# Altium PCB CarPCB.PcbDoc
Units mm, origin at the board's own origin, x right, y up, seen from the top; angles counter-clockwise.
Board outline 68.96 x 101.22 mm, 2 copper layers (Top Layer, Bottom Layer); 76 components, 38 nets, 373 pads, 0 vias.
Unrouted connection lines stored in the file: 6.
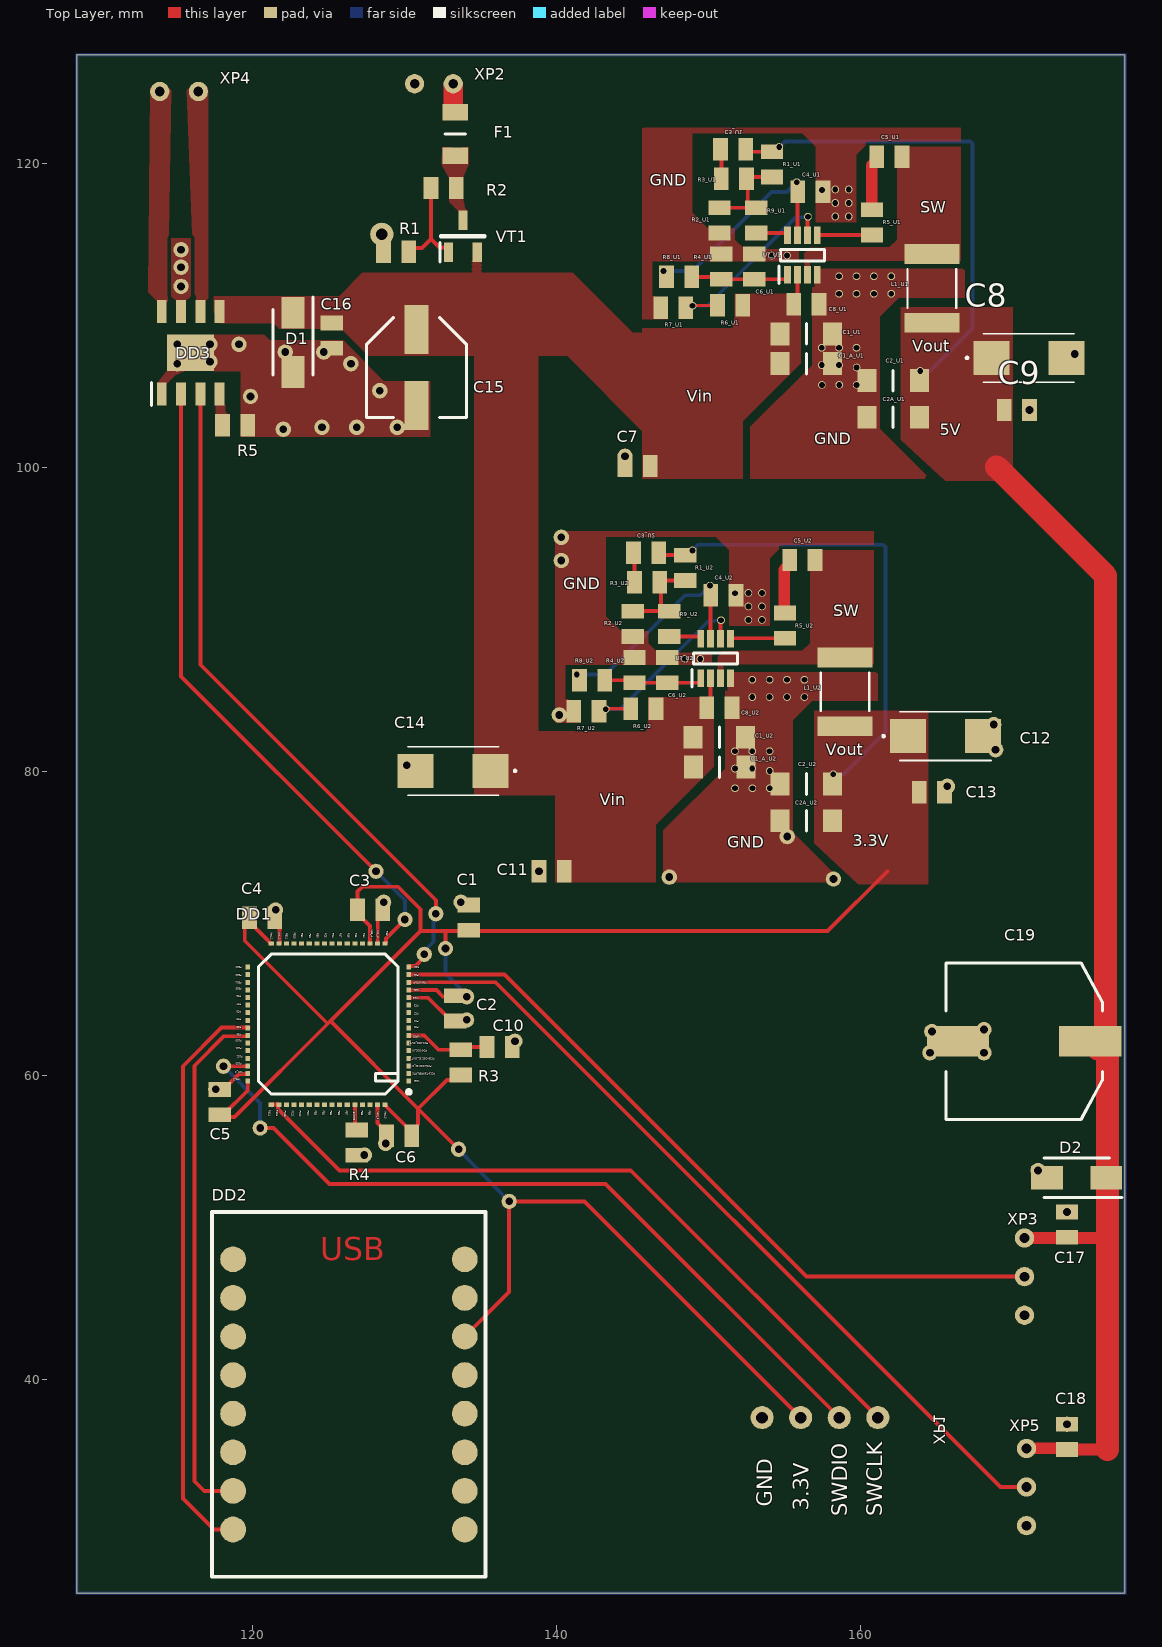
[diagram p0: Top Layer view]
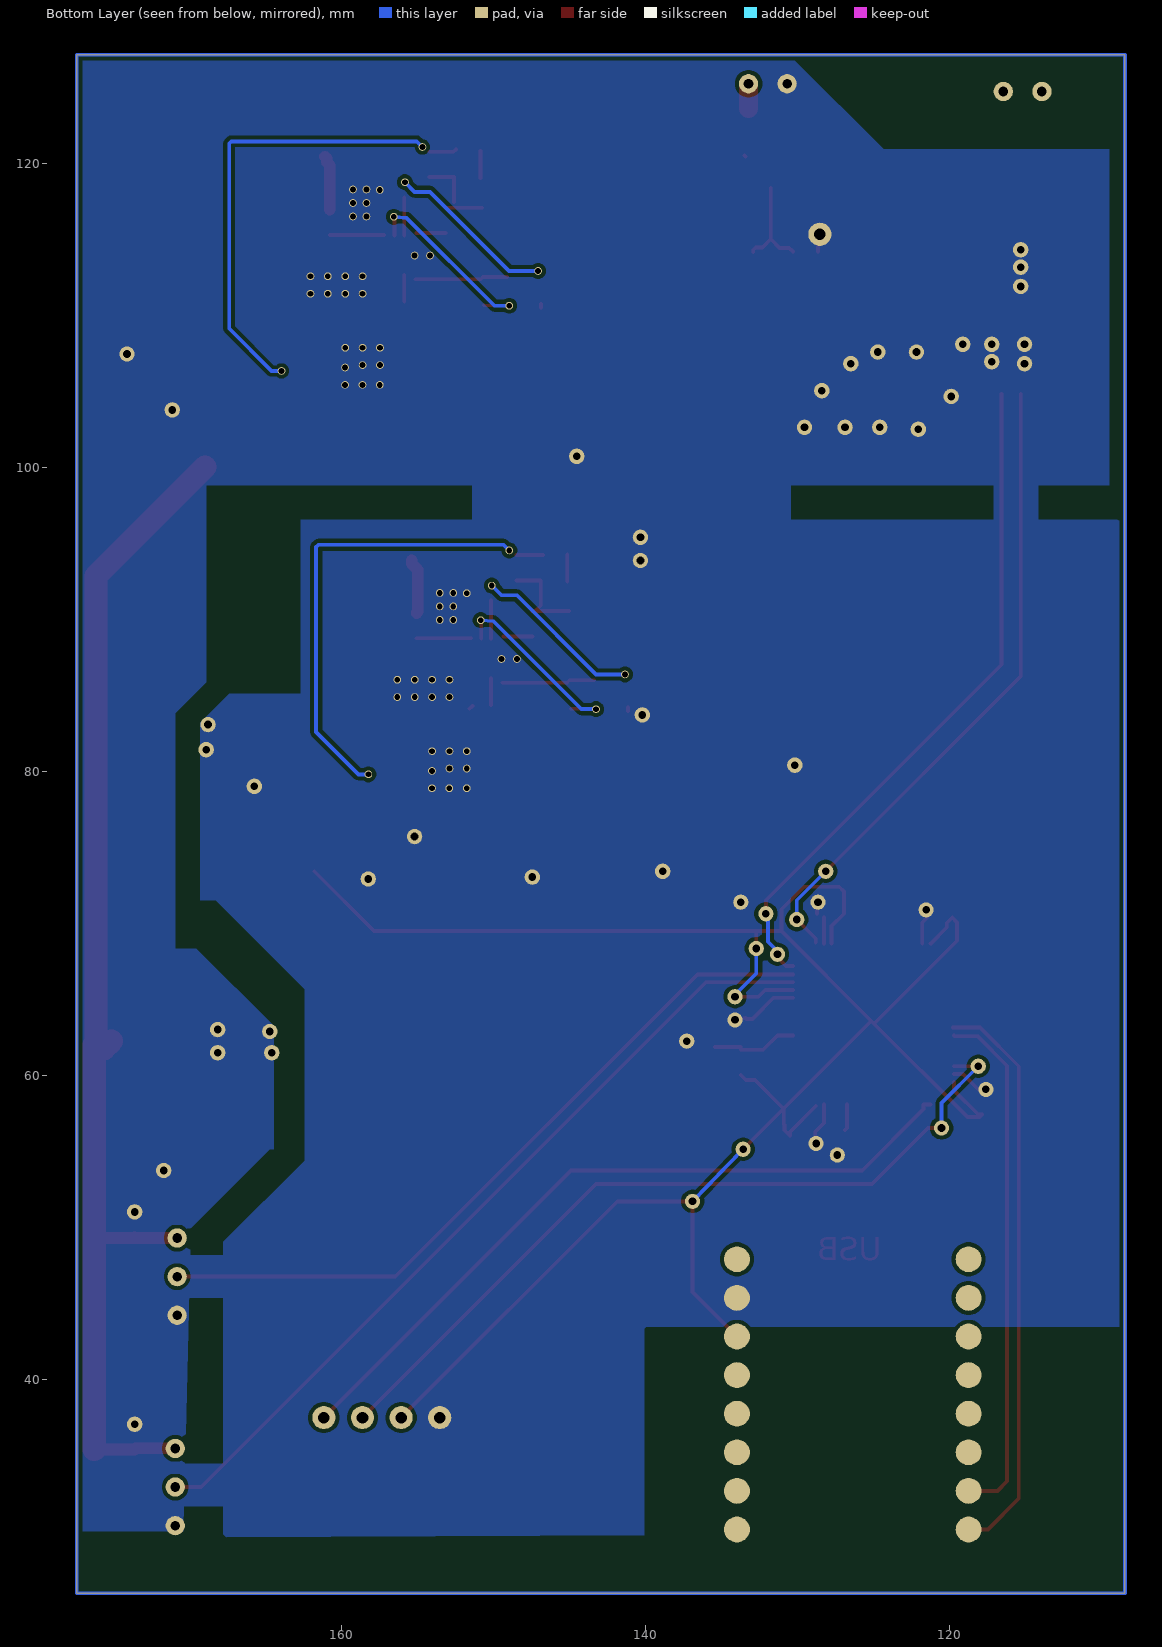
[diagram p1: Bottom Layer view, seen from below]
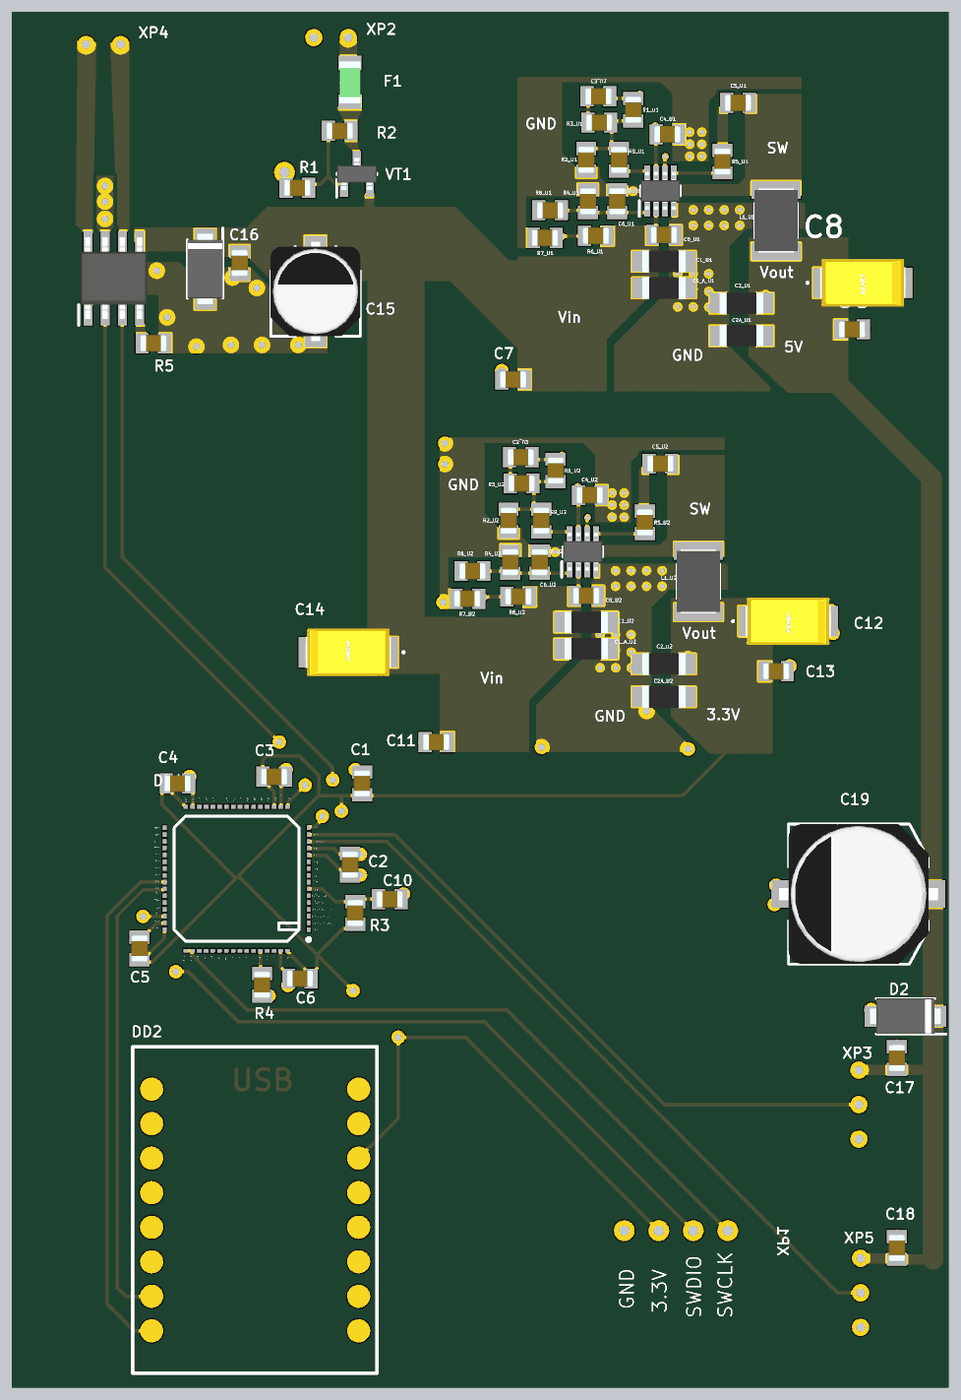
[diagram p2: 3D render of the assembled board from above, using the file's embedded part models]

## Layer stack, top to bottom
Top Solder: solder mask 0.0102, Solder Resist, Dk 3.5
Top Layer: signal copper 0.0356
Dielectric 1: dielectric 0.32, FR-4, Dk 4.8
Bottom Layer: signal copper 0.0356
Bottom Solder: solder mask 0.0102, Solder Resist, Dk 3.5

## Board outline
108.458,25.908 108.458,127.127 177.419,127.127 177.419,25.908

## Design rules (kind name [scope] priority, off if disabled: settings)
Clearance [All] p1: gap=0.254 ignorepadtopadclearanceinfootprint=FALSE
PlaneConnect [All] p1: planeconnectstyle=Direct reliefexpansion=0.508 reliefentries=4 reliefconductorwidth=0.254 reliefairgap=0.254
PolygonConnect [All] p1: connectstyle=Direct reliefconductorwidth=0.254 reliefentries=4 polygonreliefangle="90 Angle" airgapwidth=0.254
RoutingVias [All] p1: holewidth=0.711 width=1.27 viastyle="Through Hole" minholewidth=0.711 minwidth=1.27 maxholewidth=0.711 maxwidth=1.27
SolderMaskExpansion [All] p1: expansion=0.102 istentingtop=FALSE
SupplyNets "Schematic Supply Nets_3" [InNet('GND')] p1: voltage=0.000
SupplyNets "Schematic Supply Nets_2" [InNet('8.4V')] p2: voltage=0.000
SupplyNets "Schematic Supply Nets_1" [InNet('3.3V')] p3: voltage=0.000
SupplyNets "Schematic Supply Nets" [InNet('5V')] p4: voltage=0.000
Width [All] p1: maxlimit=0.254 minlimit=0.254 preferedwidth=0.254
29 further rules are at their usual default settings.

## Classes and differential pairs
channel class Buck5V: U1 U2
component class U2: C1_A_U2 C1_U2 C2_U2 C2A_U2 C3_U2 C4_U2 C5_U2 C6_U2 C8_U2 L1_U2 R1_U2 R2_U2 R3_U2 R4_U2 R5_U2 R6_U2 R7_U2 R8_U2 R9_U2 U1_U2 U?_U2
component class U1: C1_A_U1 C1_U1 C2_U1 C2A_U1 C3_U1 C4_U1 C5_U1 C6_U1 C8_U1 L1_U1 R1_U1 R2_U1 R3_U1 R4_U1 R5_U1 R6_U1 R7_U1 R8_U1 R9_U1 U?_U1
component class Car: C1 C2 C3 C4 C5 C6 C7 C8 C9 C10 C11 C12 C13 C14 C15 C16 C17 C18 C19 D1 D2 DD1 DD2 DD3 F1 GB1 M1 R1 R2 R3 R4 R5 S1 S2 VT1 XP1 XP2 XP3 XP4 XP5

## Components (designator, comment, footprint, x,y, rotation, side; value= is the part's Value field where it differs from the comment)
C1 "10µF" CAPC2012X145N 134.239,70.358 r90 top
C1_A_U1 "NS" ERJ8ENF1000V 156.464,106.807 r180 top (schematic designator C1_A)
C1_A_U2 "NS" ERJ8ENF1000V 150.749,80.264 r180 top (schematic designator C1_A)
C1_U1 "22µF" ERJ8ENF1000V 156.456,108.764 r180 top (schematic designator C1)
C1_U2 "22µF" ERJ8ENF1000V 150.741,82.221 r180 top (schematic designator C1)
C2 "0.1µF" CAPC2012X145N 133.35,64.389 r270 top
C2_U1 "22µF" ERJ8ENF1000V 162.171,105.694 r0 top (schematic designator C2)
C2_U2 "22µF" ERJ8ENF1000V 156.456,79.151 r0 top (schematic designator C2)
C2A_U1 "22µF" ERJ8ENF1000V 162.171,103.281 r0 top (schematic designator C2A)
C2A_U2 "22µF" ERJ8ENF1000V 156.456,76.738 r0 top (schematic designator C2A)
C3 "0.1µF" CAPC2012X145N 127.762,70.866 r0 top
C3_U1 "33pF" CAPC2012X145N 151.638,120.904 r0 top (schematic designator C3)
C3_U2 "33pF" CAPC2012X145N 145.923,94.361 r0 top (schematic designator C3)
C4 "0.1µF" CAPC2012X145N 120.65,70.358 r0 top
C4_U1 "0.1µF" CAPC2012X145N 156.718,118.11 r0 top (schematic designator C4)
C4_U2 "0.1µF" CAPC2012X145N 151.003,91.567 r0 top (schematic designator C4)
C5 "0.1µF" CAPC2012X145N 117.856,58.225 r90 top
C5_U1 "0.1µF" CAPC2012X145N 161.917,120.426 r180 top (schematic designator C5)
C5_U2 "0.1µF" CAPC2012X145N 156.202,93.883 r180 top (schematic designator C5)
C6 "0.1µF" CAPC2012X145N 129.667,56.007 r180 top
C6_U1 "1nF" CAPC2012X145N 153.027,113.187 r90 top (schematic designator C6)
C6_U2 "1nF" CAPC2012X145N 147.312,86.644 r90 top (schematic designator C6)
C7 "10µF" CAPC2012X145N 145.356,100.076 r180 top (schematic designator С7)
C8 "100µF" T491C 171.098,107.188 r0 top
C8_U1 "0.1µF" CAPC2012X145N 156.456,110.707 r180 top (schematic designator C8)
C8_U2 "0.1µF" CAPC2012X145N 150.741,84.164 r180 top (schematic designator C8)
C9 "0.1µF" CAPC2012X145N 170.307,103.759 r0 top
C10 "0.1µF" CAPC2012X145N 136.271,61.849 r180 top (schematic designator С10)
C11 "10µF" CAPC2012X145N 139.7,73.406 r180 top
C12 "100µF" T491C 165.608,82.296 r0 top
C13 "0.1µF" CAPC2012X145N 164.719,78.613 r0 top
C14 "100µF" T491C 133.223,80.01 r180 top
C15 "100µF" EEE0JA331XP 130.81,106.553 r270 top (schematic designator С15)
C16 "0.1µF" CAPC2012X145N 125.222,108.644 r270 top
C17 "0.1µF" CAPC2012X145N 173.609,50.165 r90 top
C18 "0.1µF" CAPC2012X145N 173.609,36.195 r90 top
C19 "470µF" EEEFK1V331P 170.783,62.23 r90 top
D1 "SMAJ10A" SODFL5226X240N 122.682,108.204 r270 top
D2 "SMAJ5.0AQ-13-F" SODFL5226X240N 174.244,53.238 r180 top
DD1 "" STM32F103C6T6 125.002,63.353 r180 top
DD2 "" ESP32C3_SUPER_MINI 117.348,50.989 r0 top
DD3 "" DRV8871DDA 115.951,107.524 r90 top
F1 "Schurter  USI 8053370874 I = 4A, U = 32V" FUSC3116X70N 133.35,121.92 r270 top
L1_U1 "5.5µH" INDC4532X340N 164.719,111.76 r270 top (schematic designator L1)
L1_U2 "5.5µH" INDC4532X340N 159.004,85.217 r270 top (schematic designator L1)
R1 "1M" CAPC2012X145N 129.472,114.173 r0 top
R1_U1 "40.2k" CAPC2012X145N 154.203,119.918 r90 top (schematic designator R1)
R1_U2 "40.2k" CAPC2012X145N 148.488,93.375 r90 top (schematic designator R1)
R2 "1M" CAPC2012X145N 132.588,118.364 r0 top
R2_U1 "7.5k" CAPC2012X145N 150.741,116.235 r270 top (schematic designator R2)
R2_U2 "12.7k" CAPC2012X145N 145.026,89.692 r270 top (schematic designator R2)
R3 "10k" CAPC2012X145N 133.731,60.833 r90 top
R3_U1 "0" CAPC2012X145N 151.695,118.977 r180 top (schematic designator R3)
R3_U2 "0" CAPC2012X145N 145.98,92.434 r180 top (schematic designator R3)
R4 "10k" CAPC2012X145N 126.873,55.558 r90 top
R4_U1 "75k" CAPC2012X145N 150.868,113.187 r90 top (schematic designator R4)
R4_U2 "64.9k" CAPC2012X145N 145.153,86.644 r90 top (schematic designator R4)
R5 "30k" CAPC2012X145N 118.872,102.743 r180 top
R5_U1 "20" CAPC2012X145N 160.774,116.108 r90 top (schematic designator R5)
R5_U2 "20" CAPC2012X145N 155.059,89.565 r90 top (schematic designator R5)
R6_U1 "100k" CAPC2012X145N 151.45,110.647 r180 top (schematic designator R6)
R6_U2 "100k" CAPC2012X145N 145.735,84.104 r180 top (schematic designator R6)
R7_U1 "NS" CAPC2012X145N 147.701,110.49 r180 top (schematic designator R7)
R7_U2 "NS" CAPC2012X145N 141.986,83.947 r180 top (schematic designator R7)
R8_U1 "DNP" CAPC2012X145N 148.082,112.522 r0 top (schematic designator R8)
R8_U2 "DNP" CAPC2012X145N 142.367,85.979 r0 top (schematic designator R8)
R9_U1 "20k" CAPC2012X145N 153.154,116.235 r270 top (schematic designator R9)
R9_U2 "33k" CAPC2012X145N 147.439,89.692 r270 top (schematic designator R9)
U?_U1 "MP2315" SOT65P280X100-8N 156.202,113.949 r90 top (schematic designator U?)
U?_U2 "MP2315" SOT65P280X100-8N 150.487,87.406 r90 top (schematic designator U?)
VT1 "IRLML6401" SOT95P237X112-3N 133.858,115.189 r90 top
XP1 "ST-LINK" ST-LINK 158.369,37.338 r90 top
XP2 "" EXT_SENSOR 132.08,125.222 r0 top
XP3 "" EXT_SENSOR_3pin 170.688,46.355 r90 top
XP4 "" EXT_SENSOR 115.316,124.714 r0 top
XP5 "" EXT_SENSOR_3pin 170.815,32.512 r90 top

## Footprints (in the part's own frame and the unit in brackets; to place one, negate y for a bottom-side part, rotate by r counter-clockwise, add the part's x,y. Pads: shape width x height; smd on the part's side, far side on the other; paste and mask are expansions set on the pad)
CAPC2012X145N [mm]
  rect 0.97x1.47 smd: 1(-0.83,0) 2(0.83,0)
  body extent -1,-0.63 1,0.63, height 1.45
DRV8871DDA [mm]
  rect 1.525x0.65 smd: 1(-2.712,1.905) 2(-2.712,0.635) 3(-2.712,-0.635) 4(-2.712,-1.905) 5(2.712,-1.905) 6(2.712,-0.635) 7(2.712,0.635) 8(2.712,1.905)
  rect 2.4x3.1 smd: 9(0,0)
  silkscreen extent -3.47,2.58 -1.95,2.58, body extent -3,-2.45 3,2.45, height 1.57
EEE0JA331XP [mm]
  rect 3.2x1.6 smd: 1(-2.5,0) 2(2.5,0)
  silkscreen extent -3.3,-3.3 3.3,3.3, body extent -3.65,-3.3 3.65,3.3, height 7.7
EEEFK1V331P [mm]
  rect 2x4.1 smd: 1(0,-4.35) 2(0,4.35)
  silkscreen extent -5.15,-5.15 5.15,5.15, body extent -5.15,-5.85 5.15,5.85, height 10.2
ERJ8ENF1000V [mm]
  rect 1.25x1.5 smd: 1(-1.725,0) 2(1.725,0)
  silkscreen extent 0,-0.67 0,0.67, body extent -1.6,-0.8 1.6,0.8, height 0.6
ESP32C3_SUPER_MINI [mm]
  round 1.7 all layers, no hole: 3.3V(16.637,-8.19) 5V(16.637,-3.11) GND(16.637,-5.65) GPIO0(16.637,-20.89) GPIO1(16.637,-18.35) GPIO2(16.637,-15.81) GPIO3(16.637,-13.27) GPIO4(16.637,-10.73) GPIO5(1.397,-3.11) GPIO6(1.397,-5.65) GPIO7(1.397,-8.19) GPIO8(1.397,-10.73) GPIO9(1.397,-13.27) GPIO10(1.397,-15.81) GPIO20(1.397,-18.35) GPIO21(1.397,-20.89)
  silkscreen extent 0,-24 18,0
EXT_SENSOR [mil]
  round 50 hole 25: 1(45,0) 2(-55,0)
EXT_SENSOR_3pin [mil]
  round 50 hole 25: 1(115,-5) 2(15,-5) 3(-85,-5)
FUSC3116X70N [mm]
  rect 1.07x1.68 smd: 1(-1.43,0) 2(1.43,0)
  silkscreen extent 0,-0.67 0,0.67, body extent -1.55,-0.77 1.55,0.77, height 0.7
INDC4532X340N [mil]
  rect 51x142 smd: 1(-89,0) 2(89,0)
  silkscreen extent -50,-63 50,63, body extent -93,-63 93,63, height 126
SODFL5226X240N [mm]
  rect 2.09x1.53 smd: 1(-1.95,0) 2(1.95,0)
  silkscreen extent -3,-1.3 2.15,1.3, body extent -2.6,-1.3 2.6,1.3, height 2.4
SOT65P280X100-8N [mm]
  rect 1.15x0.45 smd: "1 AAM"(-1.3,0.975) "2 IN"(-1.3,0.325) "3 SW"(-1.3,-0.325) "4 GND"(-1.3,-0.975) "5 BST"(1.3,-0.975) "6 EN/SYNC"(1.3,-0.325) "7 VCC"(1.3,0.325) "8 FB"(1.3,0.975)
  silkscreen extent -1.88,-1.45 0.38,1.55, body extent -1.4,-1.45 1.4,1.45, height 1
SOT95P237X112-3N [mm]
  rect 1.3x0.6 smd: 1(-1.05,0.95) 2(-1.05,-0.95) 3(1.05,0)
  silkscreen extent -1.7,-1.46 0.05,1.5, body extent -1.18,-1.46 1.18,1.46, height 1.12
ST-LINK [mil]
  round 60 hole 30: 3.3V(5,90) GND(5,190) SWCLK(5,-110) SWDIO(5,-10)
STM32F103C6T6 [mm] "CQFP, 64-Leads, Body 9,50x9,50mm, Pitch 0,50mm, IPC Medium Density"
  rect 0.28x0.33 smd: 1(-5.3,3.75) 2(-5.3,3.25) 3(-5.3,2.75) 4(-5.3,2.25) 5(-5.3,1.75) 6(-5.3,1.25) 7(-5.3,0.75) 8(-5.3,0.25) 9(-5.3,-0.25) 10(-5.3,-0.75) 11(-5.3,-1.25) 12(-5.3,-1.75) 13(-5.3,-2.25) 14(-5.3,-2.75) 15(-5.3,-3.25) 16(-5.3,-3.75) 33(5.3,-3.75) 34(5.3,-3.25) 35(5.3,-2.75) 36(5.3,-2.25) 37(5.3,-1.75) 38(5.3,-1.25) 39(5.3,-0.75) 40(5.3,-0.25) 41(5.3,0.25) 42(5.3,0.75) 43(5.3,1.25) 44(5.3,1.75) 45(5.3,2.25) 46(5.3,2.75) 47(5.3,3.25) 48(5.3,3.75)
  rect 0.33x0.28 smd: 17(-3.75,-5.3) 18(-3.25,-5.3) 19(-2.75,-5.3) 20(-2.25,-5.3) 21(-1.75,-5.3) 22(-1.25,-5.3) 23(-0.75,-5.3) 24(-0.25,-5.3) 25(0.25,-5.3) 26(0.75,-5.3) 27(1.25,-5.3) 28(1.75,-5.3) 29(2.25,-5.3) 30(2.75,-5.3) 31(3.25,-5.3) 32(3.75,-5.3) 49(3.75,5.3) 50(3.25,5.3) 51(2.75,5.3) 52(2.25,5.3) 53(1.75,5.3) 54(1.25,5.3) 55(0.75,5.3) 56(0.25,5.3) 57(-0.25,5.3) 58(-0.75,5.3) 59(-1.25,5.3) 60(-1.75,5.3) 61(-2.25,5.3) 62(-2.75,5.3) 63(-3.25,5.3) 64(-3.75,5.3)
  silkscreen extent -5.43,-4.6 4.6,4.6, body extent -5,-5 5,5, height 1.6
T491C [mm]
  rect 2.37x2.23 smd: 1(-2.47,0) 2(2.47,0)
  silkscreen extent -4.12,-1.6 3,1.6, body extent -3.15,-1.75 3.15,1.75, height 2.81

## Part data
C1 C2 C3 C3_U1 C3_U2 C4 C4_U1 C4_U2 C5 C5_U1 C5_U2 C6 C6_U1 C6_U2 C7 C8_U1 C8_U2 C9 C10 C11 C13 C16 C17 C18: library part 0805C, "Capacitor", Arrow Part Number=CL21A106KAYNNNE, Manufacturer_Name=SAMSUNG, Mouser Part Number=187-CL21A106KAYNNNE, Arrow Price/Stock=https://www.arrow.com/en/products/cl21a106kaynnne/samsung-electro-mechanics?utm_currency=USD&region=nac, Datasheet Link=https://datasheet.datasheetarchive.com/originals/distributors/Datasheets_SAMA/6a45835c9b7400e9b49c55c38a8ff4a2.pdf, Height=1.45mm, Manufacturer_Part_Number=CL21A106KAYNNNE, Mouser Price/Stock=https://www.mouser.co.uk/ProductDetail/Samsung-Electro-Mechanics/CL21A106KAYNNNE?qs=yOVawPpwOwmTXAd4dJtNjA%3D%3D
C1_A_U1 C1_A_U2 C1_U1 C1_U2 C2_U1 C2_U2 C2A_U1 C2A_U2: library part 1206C, "Capacitor", Manufacturer_Name=Panasonic, Manufacturer_Part_Number=ERJ8ENF4022V, Datasheet Link=http://docs-europe.electrocomponents.com/webdocs/13ba/0900766b813ba21b.pdf, Height=0.7mm
C8 C12 C14: library part "Capacitor Tantal Case C", "Capacitor Polarised", Manufacturer_Name=YAGEO, Manufacturer_Part_Number=T491C107M016AT, Mouser Part Number=80-T491C107M016AT, Datasheet Link=https://content.kemet.com/datasheets/KEM_T2005_T491.pdf, Height=2.8mm, Mouser Price/Stock=https://www.mouser.co.uk/ProductDetail/KEMET/T491C107M016AT?qs=W04EqCCJmmuOmj0nZmoJtg%3D%3D
C15: library part EEE-FK1E101XP, "Capacitor Polarised", Manufacturer_Name=Panasonic, Mouser Part Number=667-EEE-FK1E101XP, Arrow Part Number=EEE-FK1E101XP, Arrow Price/Stock=https://www.arrow.com/en/products/eee-fk1e101xp/panasonic?region=nac, Datasheet Link=http://industrial.panasonic.com/cdbs/www-data/pdf/RDE0000/ABA0000C1181.pdf, Height=7.8mm, Manufacturer_Part_Number=EEE-FK1E101XP, Mouser Price/Stock=https://www.mouser.co.uk/ProductDetail/Panasonic/EEE-FK1E101XP?qs=qE6bgDGEOCsW6NVslB4juQ%3D%3D
C19: library part EEE-FK1E471P, "Capacitor Polarised", Manufacturer_Name=Panasonic, Mouser Part Number=667-EEE-FK1E471P, Arrow Part Number=EEE-FK1E471P, Arrow Price/Stock=https://www.arrow.com/en/products/eee-fk1e471p/panasonic?utm_currency=USD&region=europe, Datasheet Link=http://industrial.panasonic.com/cdbs/www-data/pdf/RDE0000/ABA0000C1181.pdf, Manufacturer_Part_Number=EEE-FK1E471P, Mouser Price/Stock=https://www.mouser.co.uk/ProductDetail/Panasonic/EEE-FK1E471P?qs=qE6bgDGEOCvvsolWS4cebg%3D%3D
D1: library part SMAJ5.0AQ-13-F, "TVS Diode (Uni-directional)", Manufacturer_Name="Diodes Incorporated", Mouser Part Number=621-SMAJ5.0AQ-13-F, Datasheet Link=https://www.mouser.de/datasheet/2/115/ds40739-1500914.pdf, Height=2.4mm, Manufacturer_Part_Number=SMAJ5.0AQ-13-F, Mouser Price/Stock=https://www.mouser.co.uk/ProductDetail/Diodes-Incorporated/SMAJ5.0AQ-13-F?qs=17u8i%2FzlE8%2FlC4rBSQmAww%3D%3D
D2: "TVS Diode (Uni-directional)", Manufacturer_Name="Diodes Incorporated", Mouser Part Number=621-SMAJ5.0AQ-13-F, Datasheet Link=https://www.mouser.de/datasheet/2/115/ds40739-1500914.pdf, Height=2.4mm, Manufacturer_Part_Number=SMAJ5.0AQ-13-F, Mouser Price/Stock=https://www.mouser.co.uk/ProductDetail/Diodes-Incorporated/SMAJ5.0AQ-13-F?qs=17u8i%2FzlE8%2FlC4rBSQmAww%3D%3D
DD1: library part STM32F103C6T6
DD2: library part ESP32_SUPER_MINI
DD3: library part DRV8871DDA
F1: library part SF-1206S500-2, Manufacturer_Name=Bourns, Mouser Part Number=652-SF-1206S500-2, Arrow Part Number=SF-1206S500-2, Arrow Price/Stock=https://www.arrow.com/en/products/sf-1206s500-2/bourns?region=nac, Datasheet Link=https://componentsearchengine.com/Datasheets/2/SF-1206S500-2.pdf, Height=0.7mm, Manufacturer_Part_Number=SF-1206S500-2, Mouser Price/Stock=https://www.mouser.co.uk/ProductDetail/Bourns/SF-1206S500-2?qs=GIQXYiEeHGD%252By2V9Xr7ztw%3D%3D
L1_U1 L1_U2: library part B82432T1472K, "Inductor", Manufacturer_Name=TDK, Mouser Part Number=871-B82432T1472K, Manufacturer_Part_Number=B82432T1472K, Mouser Price/Stock=https://www.mouser.co.uk/ProductDetail/EPCOS-TDK/B82432T1472K?qs=%2FkiEPUfD%2Fqmca5mh9F0l1g%3D%3D
R1 R1_U1 R1_U2 R2 R2_U1 R2_U2 R3 R3_U1 R3_U2 R4 R4_U1 R4_U2 R5 R5_U1 R5_U2 R6_U1 R6_U2 R7_U1 R7_U2 R8_U1 R8_U2 R9_U1 R9_U2: library part 0805R, "Resistor", Arrow Part Number=CL21A106KAYNNNE, Manufacturer_Name=SAMSUNG, Mouser Part Number=187-CL21A106KAYNNNE, Arrow Price/Stock=https://www.arrow.com/en/products/cl21a106kaynnne/samsung-electro-mechanics?utm_currency=USD&region=nac, Datasheet Link=https://datasheet.datasheetarchive.com/originals/distributors/Datasheets_SAMA/6a45835c9b7400e9b49c55c38a8ff4a2.pdf, Height=1.45mm, Manufacturer_Part_Number=CL21A106KAYNNNE, Mouser Price/Stock=https://www.mouser.co.uk/ProductDetail/Samsung-Electro-Mechanics/CL21A106KAYNNNE?qs=yOVawPpwOwmTXAd4dJtNjA%3D%3D
VT1: "Integrated Circuit", Manufacturer_Name="UMW(Youtai Semiconductor Co.", Height=1.12mm, Manufacturer_Part_Number=IRLML6401
XP2 XP4: library part EXT_SENSOR
XP3 XP5: library part EXT_SENSOR_3pin

## Free pads (board coordinates)
  round 0.508 hole 0.381: 9(152.9,80.167) 9(158.615,106.71) 10(154.051,78.867) 10(159.766,105.41) 11(152.9,81.31) 11(158.615,107.853) 12(151.757,80.167) 12(157.472,106.71) 13(151.765,78.867) 13(157.48,105.41) 14(152.908,78.867) 14(158.623,105.41) 15(154.051,80.01) 15(159.766,106.553) 16(154.043,81.31) 16(159.758,107.853) 17(151.757,81.31) 17(157.472,107.853) 18(155.186,84.866) 18(160.901,111.409) 19(148.463,87.376) 19(154.178,113.919) 20(141.351,86.36) 20(147.066,112.903) 21(153.535,89.946) 21(159.25,116.489) 22(150.844,89.925) 22(156.559,116.468) 23(149.479,87.376) 23(155.194,113.919) 24(158.234,79.786) 24(163.949,106.329) 25(156.329,84.866) 25(162.044,111.409) 26(152.9,84.866) 26(158.615,111.409) 27(156.329,86.009) 27(162.044,112.552) 28(155.186,86.009) 28(160.901,112.552) 29(154.043,84.866) 29(159.758,111.409) 30(154.043,86.009) 30(159.758,112.552) 31(152.9,86.009) 31(158.615,112.552) 32(143.256,84.074) 32(148.971,110.617) 33(152.646,89.946) 33(158.361,116.489) 34(153.535,90.835) 34(159.25,117.378) 35(152.646,90.835) 35(158.361,117.378) 36(152.646,91.724) 36(158.361,118.267) 37(151.765,91.694) 37(157.48,118.237) 38(148.963,94.518) 38(154.678,121.061) 39(150.114,92.202) 39(155.829,118.745) 40(153.535,91.724) 40(159.25,118.267)
  round 1.016 hole 0.508: 41(115.062,106.807) 41(115.062,108.077) 41(115.316,111.887) 41(115.316,113.157) 41(115.316,114.3) 41(117.221,106.934) 41(117.221,108.077) 41(119.126,108.077) 41(119.888,104.648) 41(122.047,102.489) 41(122.174,107.569) 41(124.587,102.616) 41(124.714,107.569) 41(126.492,106.807) 41(126.873,102.616) 41(128.397,105.029) 41(129.54,102.616) 41(130.175,80.391) 41(138.87,73.406) 41(140.208,83.693) 41(140.335,93.853) 41(140.335,95.377) 41(144.526,100.711) 41(147.447,73.025) 41(155.194,75.692) 41(158.242,72.898) 41(164.592,61.468) 41(164.719,62.865) 41(165.735,78.994) 41(168.148,61.468) 41(168.148,62.992) 41(168.783,83.058) 41(168.91,81.407) 41(171.137,103.759) 41(171.704,53.721) 41(173.609,37.025) 41(173.609,50.995) 41(174.117,107.442)
  round 1.524 hole 0.762: 41(128.524,115.316)
  round 1 hole 0.5: 43(128.143,73.406) 43(130.048,70.231) 43(131.318,67.945) 43(132.08,70.612) 43(132.715,68.326) 43(133.731,71.374) 43(134.112,63.627) 43(134.112,65.151) 43(137.287,62.23) 44(117.602,59.055) 44(118.11,60.579) 44(120.523,56.515) 44(121.539,70.866) 44(127.381,54.737) 44(128.651,71.374) 44(128.778,55.499) 44(133.577,55.118) 44(136.906,51.689)

## Nets (pads, with @x,y where several pads share a name; then routed paths per layer and width w, separated by ;. In a path a pad name is that pad's centre, name@x,y a point inside that pad or via, vN(x,y) a via of type N, cw(c..) or ccw(c..) an arc to the next point about the centre after c; other vN are vias at no path point)
3.3V: C1.1 C2.1 C2_U2.2 C2A_U2.2 C3.1 C3_U2.2 C4.1 C5.1 C6.1 C12.1 C13.1 DD1.13 DD1.19 DD1.32 DD1.48 DD1.64 DD2.3.3V L1_U2.2 pad.24@158.234,79.786 pad.38@148.963,94.518 pad.43@132.715,68.326 pad.43@134.112,65.151 pad.44@133.577,55.118 pad.44@136.906,51.689 R1_U2.2 R3.1 XP1.3.3V | length 176
  Top Layer w0.254: DD1.48@119.702,59.557 119.702,58.991 118.106,57.395 C5.1 118.023,57.228 118.823,57.228 124.968,63.373 ; DD1.32 121.227,68.653 120.178,69.702 120.178,70 C4.1 119.507,70.045 119.507,68.834 124.968,63.373 ; DD1.19 127.752,69.796 126.932,70.616 C3.1 126.932,72.068 127.254,72.39 129.584,72.39 131.064,70.91 131.064,69.469 ; DD1.64@128.798,57.956 128.81,57.944 130.497,56.257 C6.1 130.855,56.365 130.855,56.709 130.91,56.764 130.91,57.785 ; DD1.13@130.302,65.595 132.119,65.595 132.563,65.151 ; C2.1@132.69,65.151 pad.43@134.112,65.151 ; pad.43@132.715,68.326 132.715,69.469 ; pad.44@133.577,55.118 130.91,57.785 ; R3.1 133.407,59.679 132.804,59.679 130.91,57.785 ; DD2.3.3V 136.906,45.72 136.906,51.689 141.859,51.689 XP1.3.3V ; C3_U2.2@146.745,94.205 R1_U2.2 ; 161.798,73.406 157.861,69.469 132.715,69.469 ; 124.968,63.373 125.145,63.55 ; 125.145,63.55 131.064,69.469 ; 125.145,63.55 130.91,57.785 ; 131.064,69.469 132.715,69.469
  Bottom Layer w0.254: pad.43@132.715,68.326 132.715,66.675 pad.43@134.239,65.151 ; pad.44@133.577,55.118 pad.44@136.906,51.689 ; pad.38@148.963,94.518 149.336,94.891 161.522,94.891 161.671,94.742 161.671,82.565 158.891,79.786 pad.24@158.234,79.786
5V: C2_U1.2 C2A_U1.2 C3_U1.2 C8.1 C9.1 C17.1 C18.1 C19.1 D2.1 L1_U1.2 pad.24@163.949,106.329 pad.38@154.678,121.061 R1_U1.2 XP3.1 XP5.1 | length 111.1
  Top Layer w0.254: C3_U1.2 152.624,120.748 R1_U1.2 ; C17.1@173.55,49.276 C17.1 ; 176.217,49.335 176.276,49.276
  Top Layer w0.762: XP3.1 C17.1@173.55,49.276 ; XP5.1 C18.1@173.541,35.433 ; C18.1 176.276,35.365 ; C17.1 173.668,49.276 176.276,49.276
  Top Layer w1.524: 168.974,100.013 176.149,92.837 C19.1@176.149,62.23 ; C19.1 C19.1@175.641,61.722 ; C19.1@175.641,61.992 176.276,61.992 176.276,53.238 176.276,49.276 176.276,35.365
  Bottom Layer w0.254: pad.38@154.678,121.061 155.051,121.434 167.237,121.434 167.386,121.285 167.386,109.108 164.606,106.329 pad.24@163.949,106.329
8.4V: "U?_U1.2 IN" "U?_U2.2 IN" C1_A_U1.2 C1_A_U2.2 C1_U1.2 C1_U2.2 C7.1 C8_U1.2 C8_U2.2 C11.1 C14.1 C15.1 C16.1 D1.1 DD3.5 R6_U1.1 R6_U2.1 VT1.2 | length 3.5
  Top Layer w0.254: C8_U2.2@150.162,84.355 150.162,86.106 ; C8_U1.2@155.877,110.898 155.877,112.649
GND: "U?_U1.4 GND" "U?_U2.4 GND" C1.2 C1_A_U1.1 C1_A_U2.1 C1_U1.1 C1_U2.1 C2.2 C2_U1.1 C2_U2.1 C2A_U1.1 C2A_U2.1 C3.2 C4.2 C4_U1.2 C4_U2.2 C5.2 C6.2 C6_U1.2 C6_U2.2 C7.2 C8.2 C8_U1.1 C8_U2.1 C9.2 C10.1 C11.2 C12.2 C13.2 C14.2 C15.2 C16.2 C17.2 C18.2 C19.2 D1.2 D2.2 DD1.12 DD1.18 DD1.31 DD1.47 DD1.63 DD2.GND DD3.1 DD3.7 DD3.9 pad.9 pad.10 pad.11 pad.12 pad.13 pad.14 pad.15 pad.16 pad.17 pad.18 pad.19 pad.21 pad.23 pad.25 pad.26 pad.27 pad.28 pad.29 pad.30 pad.31 pad.33 pad.34 pad.35 pad.36 pad.37 pad.40 pad.41 pad.43@133.731,71.374 pad.43@134.112,63.627 pad.43@137.287,62.23 pad.44@117.602,59.055 pad.44@121.539,70.866 pad.44@127.381,54.737 pad.44@128.651,71.374 pad.44@128.778,55.499 R1.1 R2_U1.2 R2_U2.2 R4.1 R4_U1.2 R4_U2.2 R5.1 R7_U1.2 R7_U2.2 XP1.GND XP2.2 XP3.3 XP5.3 | length 14.6
  Top Layer w0.254: C5.2 118.106,59.055 119.122,60.071 DD1.47@119.702,60.071 ; C4.2 121.793,70.045 DD1.31@121.793,68.653 ; DD1.63 128.252,56.842 128.837,56.257 C6.2 ; DD1.18@128.26,68.653 C3.2@128.26,70.358 ; pad.41@128.524,115.316 128.642,115.198 R1.1 ; C3.2@128.719,70.616 C3.2@128.719,70.866 ; DD1.12@130.302,65.087 131.572,65.087 132.973,63.686 C2.2@133.223,63.686 ; C2.2@133.35,63.686 133.418,63.754 pad.43@134.112,63.627 ; R7_U2.2 R7_U2.2@141.156,84.197 ; R7_U1.2 R7_U1.2@146.871,110.74 ; C8_U2.1@151.384,84.291 C8_U2.1@151.571,84.104
NetC3_U1_1: C3_U1.1 R3_U1.2 | length 1.8
  Top Layer w0.254: R3_U1.2@150.868,119.006 C3_U1.1@150.868,120.795
NetC3_U2_1: C3_U2.1 R3_U2.2 | length 1.8
  Top Layer w0.254: R3_U2.2@145.153,92.463 C3_U2.1@145.153,94.252
NetC4_U1_1: "U?_U1.7 VCC" C4_U1.1 pad.20@147.066,112.903 pad.39@155.829,118.745 R8_U1.1 | length 13.7
  Top Layer w0.254: 155.877,115.249 C4_U1.1@155.877,117.756
  Bottom Layer w0.254: pad.20@147.059,112.903 148.971,112.903 154.178,118.11 155.194,118.11 pad.39@155.829,118.745
NetC4_U2_1: "U?_U2.7 VCC" C4_U2.1 pad.20@141.351,86.36 pad.39@150.114,92.202 R8_U2.1 | length 13.7
  Top Layer w0.254: 150.162,88.706 C4_U2.1@150.162,91.213
  Bottom Layer w0.254: pad.20@141.344,86.36 143.256,86.36 148.463,91.567 149.479,91.567 pad.39@150.114,92.202
NetC5_U1_1: "U?_U1.3 SW" C5_U1.1 L1_U1.1
NetC5_U1_2: C5_U1.2 R5_U1.2 | length 3.6
  Top Layer w0.762: R5_U1.2 160.774,119.863 160.983,120.072 160.983,120.322 C5_U1.2
NetC5_U2_1: "U?_U2.3 SW" C5_U2.1 L1_U2.1
NetC5_U2_2: C5_U2.2 R5_U2.2 | length 3.7
  Top Layer w0.762: R5_U2.2 155.059,90.433 154.993,90.499 154.993,93.254 155.372,93.633 C5_U2.2
NetC6_U1_1: "U?_U1.1 AAM" C6_U1.1 R4_U1.1 R8_U1.2 | length 5.9
  Top Layer w0.254: R8_U1.2@149.098,112.514 R4_U1.1@150.711,112.514 ; R4_U1.1 C6_U1.1 155.129,112.357
NetC6_U2_1: "U?_U2.1 AAM" C6_U2.1 R4_U2.1 R8_U2.2 | length 5.9
  Top Layer w0.254: R8_U2.2@143.383,85.971 R4_U2.1@144.996,85.971 ; R4_U2.1 C6_U2.1 149.414,85.814
NetC10_2: C10.2 DD1.7 R3.2 | length 5.5
  Top Layer w0.254: DD1.7@130.302,62.611 131.318,62.611 132.266,61.663 R3.2 ; R3.2@133.731,61.849 C10.2
NetDD1_41: DD1.41 DD2.GPIO21 | length 38
  Top Layer w0.254: DD2.GPIO21 117.475,30.099 115.443,32.131 115.443,60.579 117.983,63.119 DD1.41@119.761,63.119
NetDD1_42: DD1.42 DD2.GPIO20 | length 34.5
  Top Layer w0.254: DD2.GPIO20 116.84,32.639 116.205,33.274 116.205,60.61 118.152,62.557 119.656,62.557 DD1.42
NetDD1_46: DD1.46 pad.44@118.11,60.579 pad.44@120.523,56.515 XP1.SWDIO | length 52.6
  Top Layer w0.254: pad.44@118.11,60.579 DD1.46@119.702,60.579 ; pad.44@120.523,56.515 121.412,56.515 125.095,52.832 143.256,52.832 XP1.SWDIO
  Bottom Layer w0.254: pad.44@118.11,60.579 120.523,58.166 pad.44@120.523,56.515
NetDD1_49: DD1.49 XP1.SWCLK | length 48.6
  Top Layer w0.254: DD1.49 121.706,58.053 121.706,57.755 125.74,53.721 144.907,53.721 XP1.SWCLK
NetDD1_60: DD1.60 R4.2 | length 1.7
  Top Layer w0.254: DD1.60 126.752,56.509 R4.2
NetDD3_4: DD3.4 R5.2
NetDD3_6: DD3.6 XP4.1
NetDD3_8: DD3.8 XP4.2
NetF1_1: F1.1 XP2.1 | length 1.9
  Top Layer w0.254: F1.1@133.223,123.604 F1.1@133.477,123.35
  Top Layer w1.27: F1.1@133.223,123.604 XP2.1@133.223,125.095
NetF1_2: F1.2 R2.2 VT1.3 | length 0.1
  Top Layer w0.254: F1.2@133.418,120.431 F1.2@133.477,120.49
NetR1_2: R1.2 R2.1 VT1.1 | length 6.7
  Top Layer w0.254: R1.2 130.552,114.423 131.178,114.423 131.758,115.003 ; R2.1 131.758,115.003 ; VT1.1 132.908,114.277 132.735,114.45 132.311,114.45 131.758,115.003
NetR1_U1_1: R1_U1.1 R2_U1.1 R3_U1.1 R9_U1.1 | length 5.7
  Top Layer w0.254: R2_U1.1 R9_U1.1@153.133,117.065 ; R9_U1.1@152.607,117.423 152.607,119.088 R1_U1.1
NetR1_U2_1: R1_U2.1 R2_U2.1 R3_U2.1 R9_U2.1 | length 6.2
  Top Layer w0.254: R2_U2.1 R9_U2.1@147.25,90.522 ; R9_U2.1 R9_U2.1@147.25,90.522 ; R1_U2.1 146.892,92.545 146.892,90.88 R9_U2.1@147.25,90.522
NetR5_U1_1: "U?_U1.5 BST" R5_U1.1 | length 3.6
  Top Layer w0.254: 157.206,115.278 R5_U1.1
NetR5_U2_1: "U?_U2.5 BST" R5_U2.1 | length 3.6
  Top Layer w0.254: 151.491,88.735 R5_U2.1
NetR6_U1_2: "U?_U1.6 EN/SYNC" pad.22@156.559,116.468 pad.32@148.971,110.617 R6_U1.2 R7_U1.1 | length 12.7
  Top Layer w0.254: pad.32@148.971,110.617 R6_U1.2 ; 156.527,115.249 pad.22@156.527,116.35
  Bottom Layer w0.254: pad.32@148.971,110.617 149.94,110.617 155.72,116.396 pad.22@156.559,116.468
NetR6_U2_2: "U?_U2.6 EN/SYNC" pad.22@150.844,89.925 pad.32@143.256,84.074 R6_U2.2 R7_U2.1 | length 12.7
  Top Layer w0.254: pad.32@143.256,84.074 R6_U2.2 ; 150.812,88.706 pad.22@150.812,89.807
  Bottom Layer w0.254: pad.32@143.256,84.074 144.225,84.074 150.005,89.853 pad.22@150.844,89.925
NetR9_U1_2: "U?_U1.8 FB" R9_U1.2 | length 1.9
  Top Layer w0.254: R9_U1.2 155.071,115.405
NetR9_U2_2: "U?_U2.8 FB" R9_U2.2 | length 1.9
  Top Layer w0.254: R9_U2.2 149.356,88.862
PWM0: DD1.15 XP3.2 | length 48.7
  Top Layer w0.254: DD1.15@130.302,66.611 136.589,66.611 156.464,46.736 XP3.2
PWM1: DD1.14 XP5.2 | length 54.4
  Top Layer w0.254: DD1.14 136.017,66.103 167.259,34.861 169.227,32.893 XP5.2
PWM2: DD1.16 DD3.3 pad.43@131.318,67.945 pad.43@132.08,70.612 | length 45
  Top Layer w0.254: DD3.3 116.586,86.995 132.08,71.501 pad.43@132.08,70.612 ; DD1.16@130.302,67.183 130.752,67.183 131.318,67.749 pad.43@131.318,67.945
  Bottom Layer w0.254: pad.43@131.318,67.945 131.318,68.147 131.937,68.766 131.937,70.469 pad.43@132.08,70.612
PWM3: DD1.17 DD3.2 pad.43@128.143,73.406 pad.43@130.048,70.231 | length 42.7
  Top Layer w0.254: DD3.2 115.316,86.233 pad.43@128.143,73.406 ; DD1.17@128.798,68.707 128.798,68.981 pad.43@130.048,70.231
  Bottom Layer w0.254: pad.43@128.143,73.406 130.048,71.501 pad.43@130.048,70.231
pads on no net: DD1.1 DD1.2 DD1.3 DD1.4 DD1.5 DD1.6 DD1.8 DD1.9 DD1.10 DD1.11 DD1.20 DD1.21 DD1.22 DD1.23 DD1.24 DD1.25 DD1.26 DD1.27 DD1.28 DD1.29 DD1.30 DD1.33 DD1.34 DD1.35 DD1.36 DD1.37 DD1.38 DD1.39 DD1.40 DD1.43 DD1.44 DD1.45 DD1.50 DD1.51 DD1.52 DD1.53 DD1.54 DD1.55 DD1.56 DD1.57 DD1.58 DD1.59 DD1.61 DD1.62 DD2.5V DD2.GPIO0 DD2.GPIO1 DD2.GPIO2 DD2.GPIO3 DD2.GPIO4 DD2.GPIO5 DD2.GPIO6 DD2.GPIO7 DD2.GPIO8 DD2.GPIO9 DD2.GPIO10
copper on no net: | length 340.4
  Bottom Layer w0.254: 108.458,25.908 177.419,25.908 177.419,127.127 108.458,127.127 108.458,25.908

## Polygon pours and split planes (outlines as drawn)
3.3V on Top Layer "3.3V_L01_P022" (solid, pour order 22): 159.871,72.547 156.964,75.253 156.964,83.977 164.465,83.977 164.465,72.547
5V on Top Layer "5V_L01_P002" (solid, remove dead copper, pour order 2): 165.586,99.09 162.679,101.796 162.679,110.52 170.053,110.52 170.053,99.09
8.4V on Top Layer "8.4V_L01_P044" (solid, pour order 44): 134.62,78.422 141.224,78.422 141.224,82.486 141.351,82.614 138.811,82.614 138.811,107.886 134.62,107.886
NetC5_U2_1 on Top Layer "NETC5_U2_1_L01_P021" (solid, pour order 21): 150.995,86.644 150.614,86.644 150.614,87.533 150.995,87.914 156.202,87.914 156.71,88.422 156.71,94.518 160.901,94.518 160.901,87.025 150.995,87.025
GND on Top Layer "GND_L01_P023" (solid, pour order 23): 158.869,72.674 147.058,72.674 147.058,76.103 151.122,80.167 151.122,85.374 151.376,85.628 151.376,86.517 161.028,86.517 161.155,86.39 161.155,84.612 156.837,84.612 155.567,83.342 155.567,75.976
8.4V on Top Layer "8.4V_L01_P024" (solid, pour order 24): 150.36,80.294 146.55,76.484 146.55,72.674 139.946,72.674 139.946,82.58 145.915,82.58 146.042,83.342 146.042,84.866 146.804,84.866 150.36,84.866
GND on Top Layer "GND_L01_P025" (solid, pour order 25): 150.487,87.787 150.233,87.533 150.233,86.995 139.946,86.995 139.946,95.915 140.073,95.788 160.901,95.788 160.901,94.899 154.932,94.899 154.043,94.01 154.043,89.565 151.376,89.565 151.376,94.518 150.487,95.407 143.248,95.407 143.248,90.2 144.264,89.184 146.042,89.184 146.042,88.422 146.677,87.787 150.233,87.787
GND on Top Layer "GND_L01_P027" (solid, pour order 27): 141.605,84.709 141.605,83.185 139.954,83.185 139.954,86.987 139.946,86.995 140.596,86.995 140.596,84.716 140.589,84.709
NetDD3_4 on Top Layer "NETDD3_4_L01_P043" (hatched Horizontal grid 0 track 0.025, pour order 43): 117.602,104.14 117.602,103.378 118.491,103.378 118.237,103.632 118.237,104.14
GND on Top Layer "GND_L01_P042" (solid, remove dead copper, pour order 42): 113.718,105.484 114.427,106.421 114.427,107.95 114.554,107.95 115.824,106.68 115.951,106.553 115.824,106.426 114.935,106.045 114.046,105.156
NetDD3_6 on Top Layer "NETDD3_6_L01_P041" (solid, pour order 41): 115.697,124.968 117.221,124.968 117.094,124.841 117.094,111.125 116.84,110.871 116.332,110.871 116.332,111.252 116.205,111.379
NetDD3_8 on Top Layer "NETDD3_8_L01_P040" (solid, pour order 40): 113.792,110.871 113.157,111.506 113.282,124.968 114.677,124.968 114.427,110.871
GND on Top Layer "GND_L01_P039" (solid, pour order 39): 115.57,110.871 115.951,111.252 115.951,115.062 114.681,115.062 114.681,111.252 115.062,110.871
GND on Top Layer "GND_L01_P038" (solid, pour order 38): 117.475,108.712 120.777,108.712 121.158,108.331 125.984,108.331 128.651,105.664 131.699,105.664 131.699,101.981 119.253,101.981 119.253,106.299 117.475,106.299
8.4V on Top Layer "8.4V_L01_P036" (solid, pour order 36): 117.856,109.474 121.412,109.474 121.793,109.093 125.857,109.093 127.635,107.315 140.716,107.315 146.304,101.727 146.304,108.839 145.034,108.839 141.097,112.776 127.254,112.776 125.73,111.252 117.475,111.252 117.475,110.236
8.4V on Top Layer "8.4V_L01_P035" (hatched Horizontal grid 0 track 0.254, pour order 35): 134.556,113.665 134.556,111.989 135.319,111.989 135.001,112.306 135.001,113.754
NetF1_2 on Top Layer "NETF1_2_L01_P030" (hatched Horizontal grid 0 track 0.025, remove dead copper, pour order 30): 134.112,116.84 133.985,117.094 133.858,117.729 132.969,117.729 132.969,117.475 133.604,116.84
NetF1_2 on Top Layer "NETF1_2_L01_P028" (solid, pour order 28): 132.969,118.999 132.461,119.888 132.514,121.031 134.239,121.031 134.239,119.888 134.112,119.634 133.858,118.999
GND on Top Layer "GND_L01_P003" (solid, remove dead copper, pour order 3): 164.584,99.217 152.773,99.217 152.773,102.646 156.837,106.71 156.837,111.917 157.091,112.171 157.091,113.06 166.743,113.06 166.87,112.933 166.87,111.155 162.552,111.155 161.282,109.885 161.282,102.519
8.4V on Top Layer "8.4V_L01_P004" (solid, remove dead copper, pour order 4): 156.075,106.837 152.265,103.027 152.265,99.217 145.661,99.217 145.661,109.123 151.63,109.123 151.757,109.885 151.757,111.409 152.519,111.409 156.075,111.409
GND on Top Layer "GND_L01_P000" (solid, remove dead copper, pour order 0): 147.32,111.252 147.32,109.728 145.669,109.728 145.669,113.53 145.661,113.538 146.311,113.538 146.311,111.259 146.304,111.252
NetC5_U1_1 on Top Layer "NETC5_U1_1_L01_P001" (solid, remove dead copper, pour order 1): 156.71,113.187 156.329,113.187 156.329,114.076 156.71,114.457 161.917,114.457 162.425,114.965 162.425,121.061 166.616,121.061 166.616,113.568 156.71,113.568
GND on Top Layer "GND_L01_P006" (solid, remove dead copper, pour order 6): 156.202,114.33 155.948,114.076 155.948,113.538 145.661,113.538 145.661,122.458 145.788,122.331 166.616,122.331 166.616,121.442 160.647,121.442 159.758,120.553 159.758,116.108 157.091,116.108 157.091,121.061 156.202,121.95 148.963,121.95 148.963,116.743 149.979,115.727 151.757,115.727 151.757,114.965 152.392,114.33 155.948,114.33
GND on Bottom Layer "GND_L02_P053" (solid, pour order 53): 117.094,99.187 117.094,95.25 114.173,95.25 114.173,99.187
GND on Bottom Layer "GND_L02_P048" (solid, pour order 48): 167.767,29.591 167.767,49.022 162.433,54.356 162.433,65.659 168.275,71.501 169.291,71.501 169.291,83.185 167.386,85.09 162.687,85.09 162.687,96.52 108.966,96.52 108.839,96.647 108.712,96.52 108.712,29.845
GND on Bottom Layer "GND_L02_P052" (solid, pour order 52): 167.767,34.417 170.942,34.417 170.942,31.623 167.767,31.623
GND on Bottom Layer "GND_L02_P051" (solid, pour order 51): 167.513,48.133 170.434,48.133 170.434,45.339 167.513,45.339
GND on Bottom Layer "GND_L02_P050" (solid, pour order 50): 130.429,100.076 130.429,95.25 131.318,96.139 151.384,96.139 151.384,99.695
GND on Bottom Layer "GND_L02_P049" (solid, pour order 49): 109.474,120.904 124.333,120.904 130.302,126.873 177.292,126.873 177.292,99.441 176.657,98.806 109.474,98.806
GND on Bottom Layer "GND_L02_P046" (solid, pour order 46): 144.018,101.6 146.431,101.6 146.431,99.06 144.018,99.06
GND on Bottom Layer "GND_L02_P005" (solid, pour order 5): 167.513,99.06 167.513,122.301 145.415,122.301 145.415,99.06
GND on Bottom Layer "GND_L02_P045" (solid, pour order 45): 170.434,29.591 177.165,29.591 177.165,115.316 169.799,122.682 145.415,122.682 145.415,99.06 168.91,99.06 168.91,85.852 170.942,83.82 170.942,68.326 169.545,68.326 164.465,63.246 164.465,55.118 164.719,55.118 169.926,49.911

## Other copper
Multi-Layer:
  pour cut-out: 140.081,28.829 140.081,43.307 139.954,43.434 108.585,43.434 108.585,29.21 108.966,28.829

## Silkscreen, mask and mechanical layers (free items; w line width, h text height)
Top Overlay:
  text "GND" at 146.169,118.521 h0.76
  text "SW" at 163.949,116.743 h0.76
  text "Vout" at 163.441,107.599 h0.76
  text "Vin" at 148.582,104.297 h0.76
  text "5V" at 165.227,102.108 h0.76
  text "GND" at 156.964,101.503 h0.76
  text "GND" at 140.454,91.978 h0.76
  text "SW" at 158.234,90.2 h0.76
  text "Vout" at 157.726,81.056 h0.76
  text "Vin" at 142.867,77.754 h0.76
  text "3.3V" at 159.512,75.057 h0.76
  text "GND" at 151.249,74.96 h0.76

## Text inside footprints (layer, text, board x,y; h text height)
DD1: Top Overlay "Vbat" at 131.007,59.66 h0.1 r180; Top Overlay "PC13-TAMPER_RTC" at 132.028,60.135 h0.1 r180; Top Overlay "PC14-OSC 32_IN" at 131.814,60.643 h0.1 r180; Top Overlay "PC15-OSC 32_OUT" at 132,61.151 h0.1 r180; Top Overlay "PD0-OSC_IN" at 131.531,61.659 h0.1 r180; Top Overlay "PD1-OSC_OUT" at 131.584,62.167 h0.1 r180; Top Overlay "NRST" at 131.021,62.581 h0.1 r180; Top Overlay "PC2" at 130.967,64.105 h0.1 r180; Top Overlay "PC0" at 130.967,63.216 h0.1 r180; Top Overlay "PC1" at 130.955,63.597 h0.1 r180; Top Overlay "PC3" at 130.967,64.613 h0.1 r180; Top Overlay "Vssa" at 130.998,65.121 h0.1 r180; Top Overlay "Vdda" at 131.019,65.629 h0.1 r180; Top Overlay "PA0-WKUP" at 131.488,66.137 h0.1 r180; Top Overlay "PA1" at 130.962,66.645 h0.1 r180; Top Overlay "PA2" at 130.974,67.153 h0.1 r180; Top Overlay "PA3" at 128.822,69.452 h0.1 r270; Top Overlay "Vss_4" at 128.22,69.527 h0.1 r270; Top Overlay "Vdd_4" at 127.839,69.549 h0.1 r270; Top Overlay "PA4" at 127.298,69.329 h0.1 r270; Top Overlay "PA5" at 126.79,69.325 h0.1 r270; Top Overlay "PA6" at 126.282,69.325 h0.1 r270; Top Overlay "PA7" at 125.774,69.325 h0.1 r270; Top Overlay "PC4" at 125.266,69.323 h0.1 r270; Top Overlay "PC5" at 124.758,69.318 h0.1 r270; Top Overlay "PB0" at 124.25,69.323 h0.1 r270; Top Overlay "PB1" at 123.742,69.311 h0.1 r270; Top Overlay "PB2" at 123.234,69.323 h0.1 r270; Top Overlay "PB10" at 122.726,69.353 h0.1 r270; Top Overlay "PB11" at 122.218,69.341 h0.1 r270; Top Overlay "Vss_1" at 121.743,69.384 h0.1 r270; Top Overlay "Vdd_1" at 121.235,69.405 h0.1 r270; Top Overlay "PB12" at 119.318,67.153 h0.1 r180; Top Overlay "PB13" at 119.318,66.645 h0.1 r180; Top Overlay "PB14" at 119.322,66.137 h0.1 r180; Top Overlay "PB15" at 119.318,65.756 h0.1 r180; Top Overlay "PC6" at 119.283,65.248 h0.1 r180; Top Overlay "PC7" at 119.283,64.74 h0.1 r180; Top Overlay "PC8" at 119.283,64.232 h0.1 r180; Top Overlay "PC9" at 119.283,63.724 h0.1 r180; Top Overlay "PA8" at 119.29,63.216 h0.1 r180; Top Overlay "PA9" at 119.29,62.708 h0.1 r180; Top Overlay "PA10" at 119.32,62.327 h0.1 r180; Top Overlay "PA11" at 119.308,61.819 h0.1 r180; Top Overlay "PA12" at 119.362,61.285 h0.1 r180; Top Overlay "PA13" at 119.32,60.803 h0.1 r180; Top Overlay "Vss_2" at 119.36,60.262 h0.1 r180; Top Overlay "Vdd_2" at 119.255,59.754 h0.1 r180; Top Overlay "PA14" at 121.075,57.675 h0.1 r270; Top Overlay "PA15" at 121.583,57.671 h0.1 r270; Top Overlay "PC10" at 122.091,57.664 h0.1 r270; Top Overlay "PC11" at 122.599,57.652 h0.1 r270; Top Overlay "PC12" at 123.107,57.664 h0.1 r270; Top Overlay "PD2" at 123.615,57.639 h0.1 r270; Top Overlay "PB3" at 124.123,57.639 h0.1 r270; Top Overlay "PB4" at 124.631,57.643 h0.1 r270; Top Overlay "PB5" at 125.139,57.639 h0.1 r270; Top Overlay "PB6" at 125.647,57.639 h0.1 r270; Top Overlay "PB7" at 126.155,57.639 h0.1 r270; Top Overlay "BOOT0" at 126.663,57.597 h0.1 r270; Top Overlay "PB8" at 127.171,57.639 h0.1 r270; Top Overlay "PB9" at 127.679,57.639 h0.1 r270; Top Overlay "Vss_3" at 128.22,57.584 h0.1 r270; Top Overlay "Vdd_3" at 128.728,57.606 h0.1 r270
DD2: Top Layer "USB" at 124.46,47.814 h1.52
XP1: Top Overlay "SWCLK" at 161.444,30.961 h1 r90; Top Overlay "SWDIO" at 159.158,30.961 h1 r90; Top Overlay "3.3V" at 156.618,31.342 h1 r90; Top Overlay "GND" at 154.205,31.596 h1 r90